# Altium PCB PCP-Support-STM32F407.PcbDoc (part 1 of 3)
Units mm, origin at the board's own origin, x right, y up, seen from the top; angles counter-clockwise.
Board outline 200 x 110 mm, 4 copper layers (Top Layer, Int1 (GND), Int2 (PWR), Bottom Layer), stack 1.369 mm thick; 103 components, 128 nets, 450 pads, 626 vias.
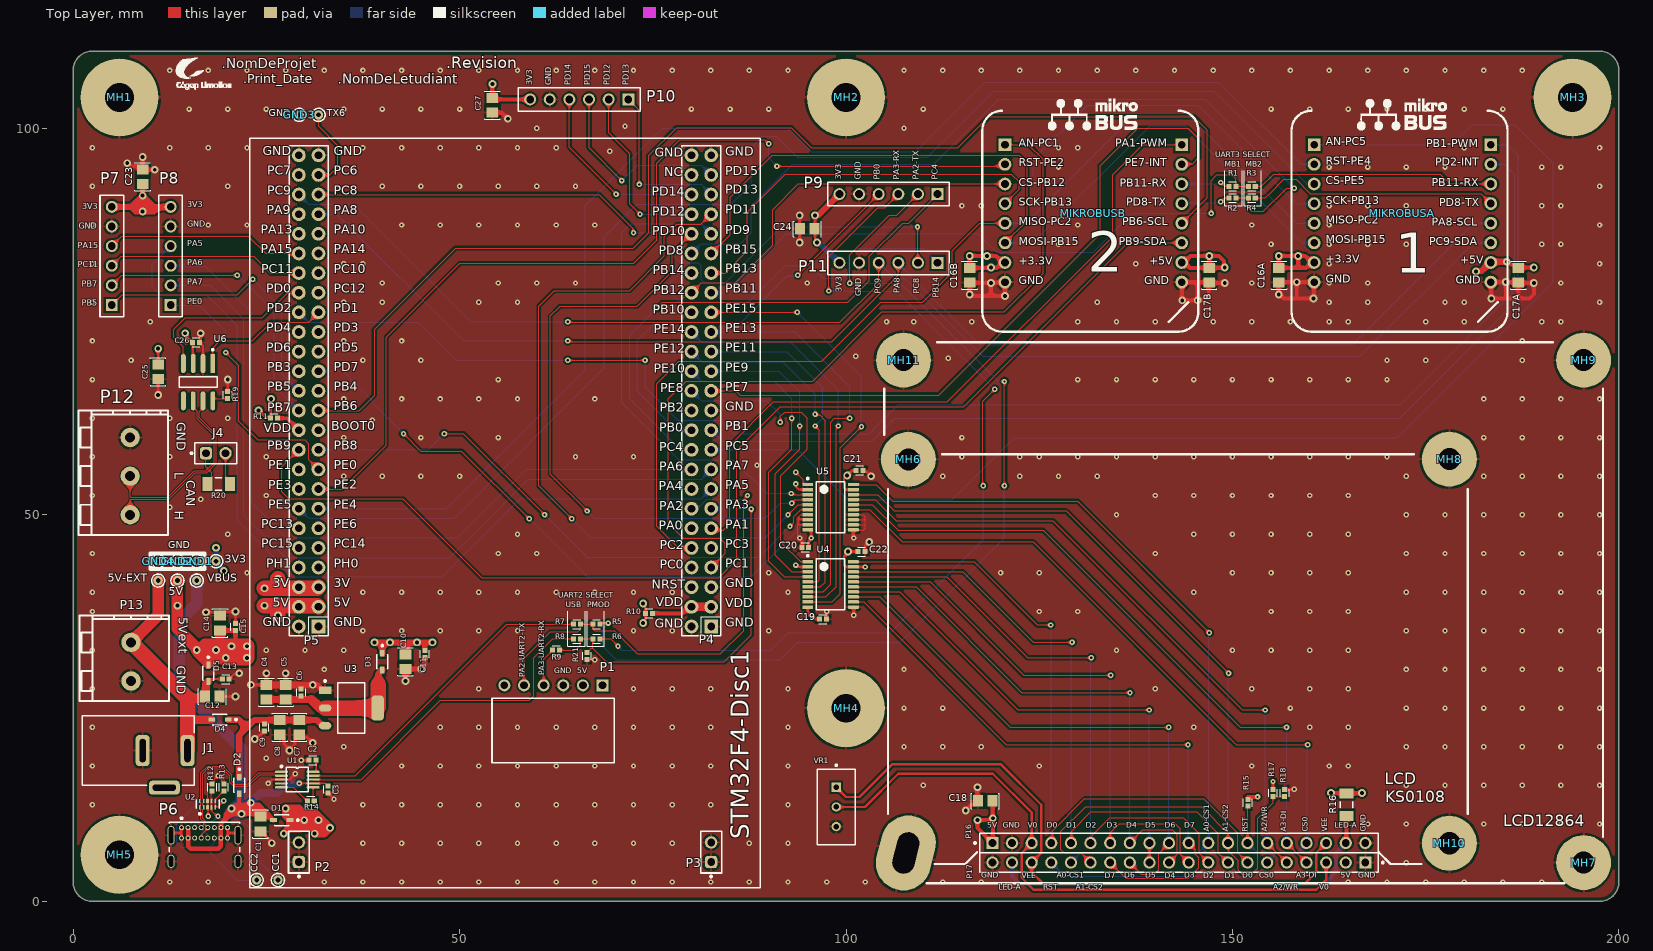
[diagram p0: Top Layer view]
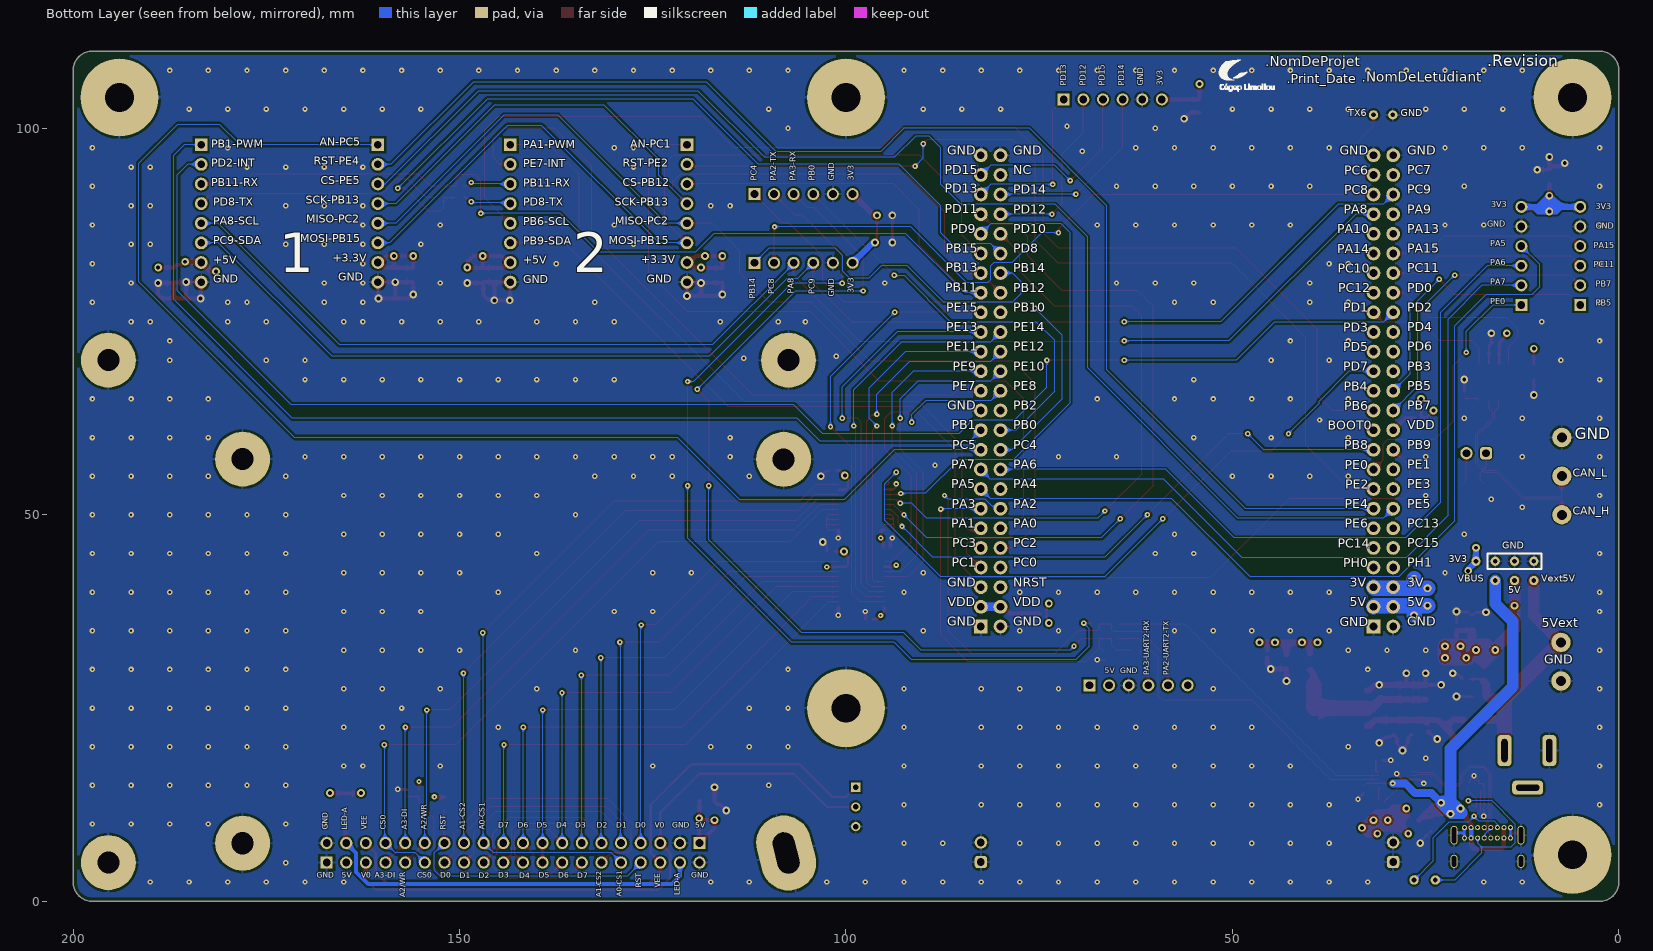
[diagram p1: Bottom Layer view, seen from below]
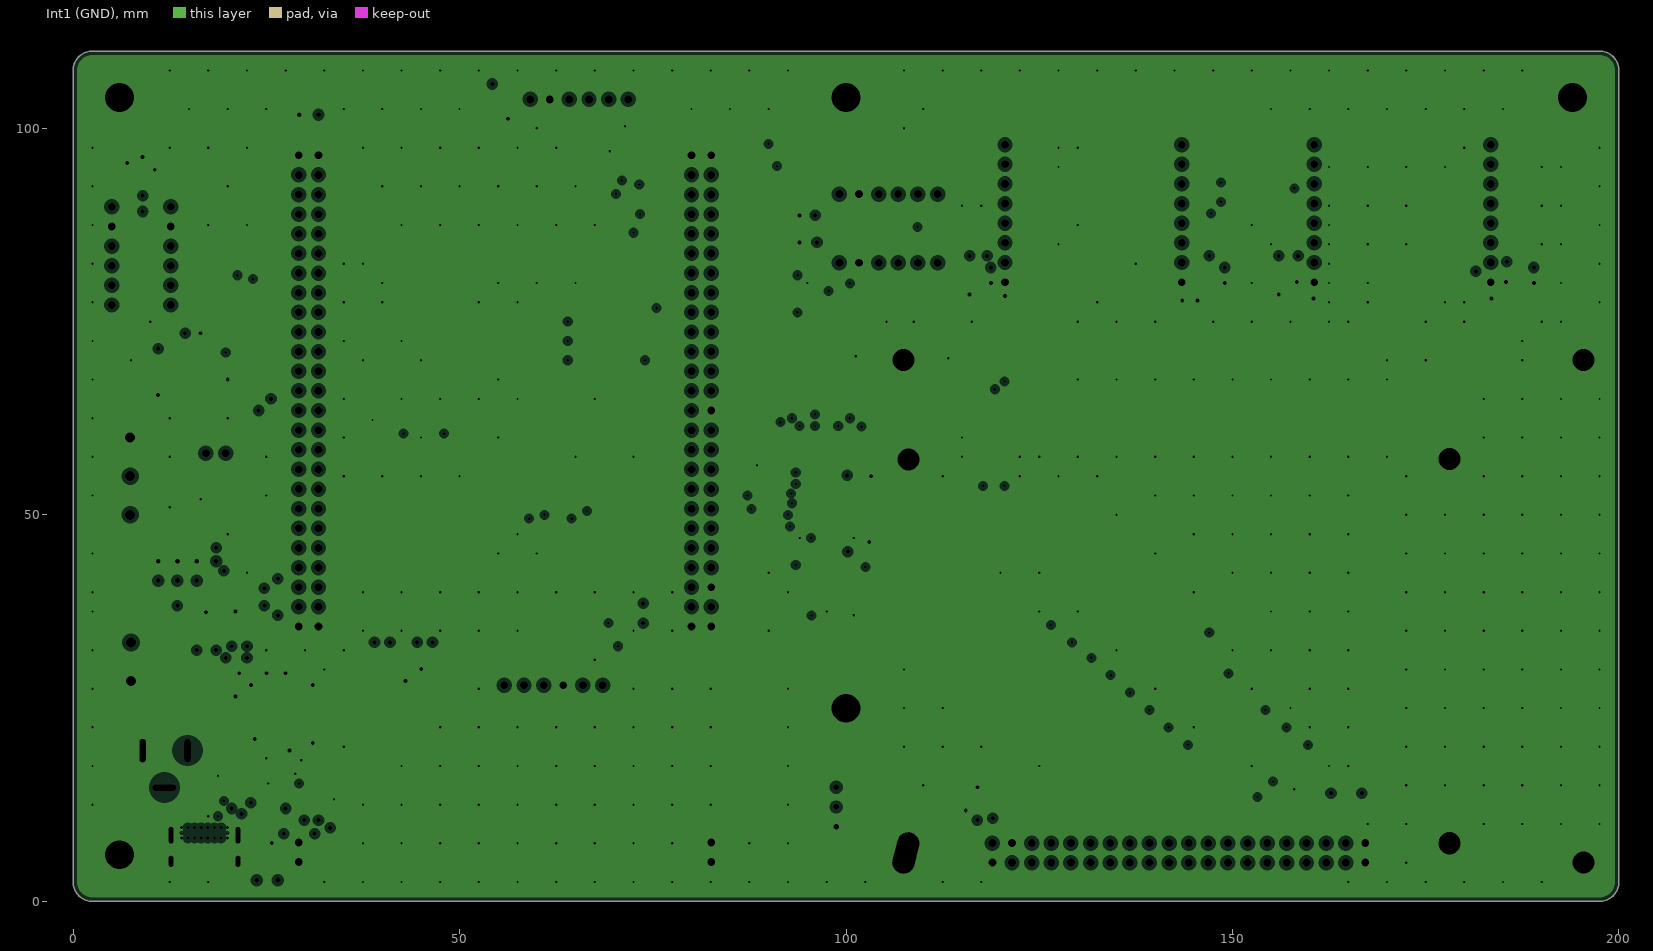
[diagram p2: Int1 (GND), clearances drawn from the general rule]
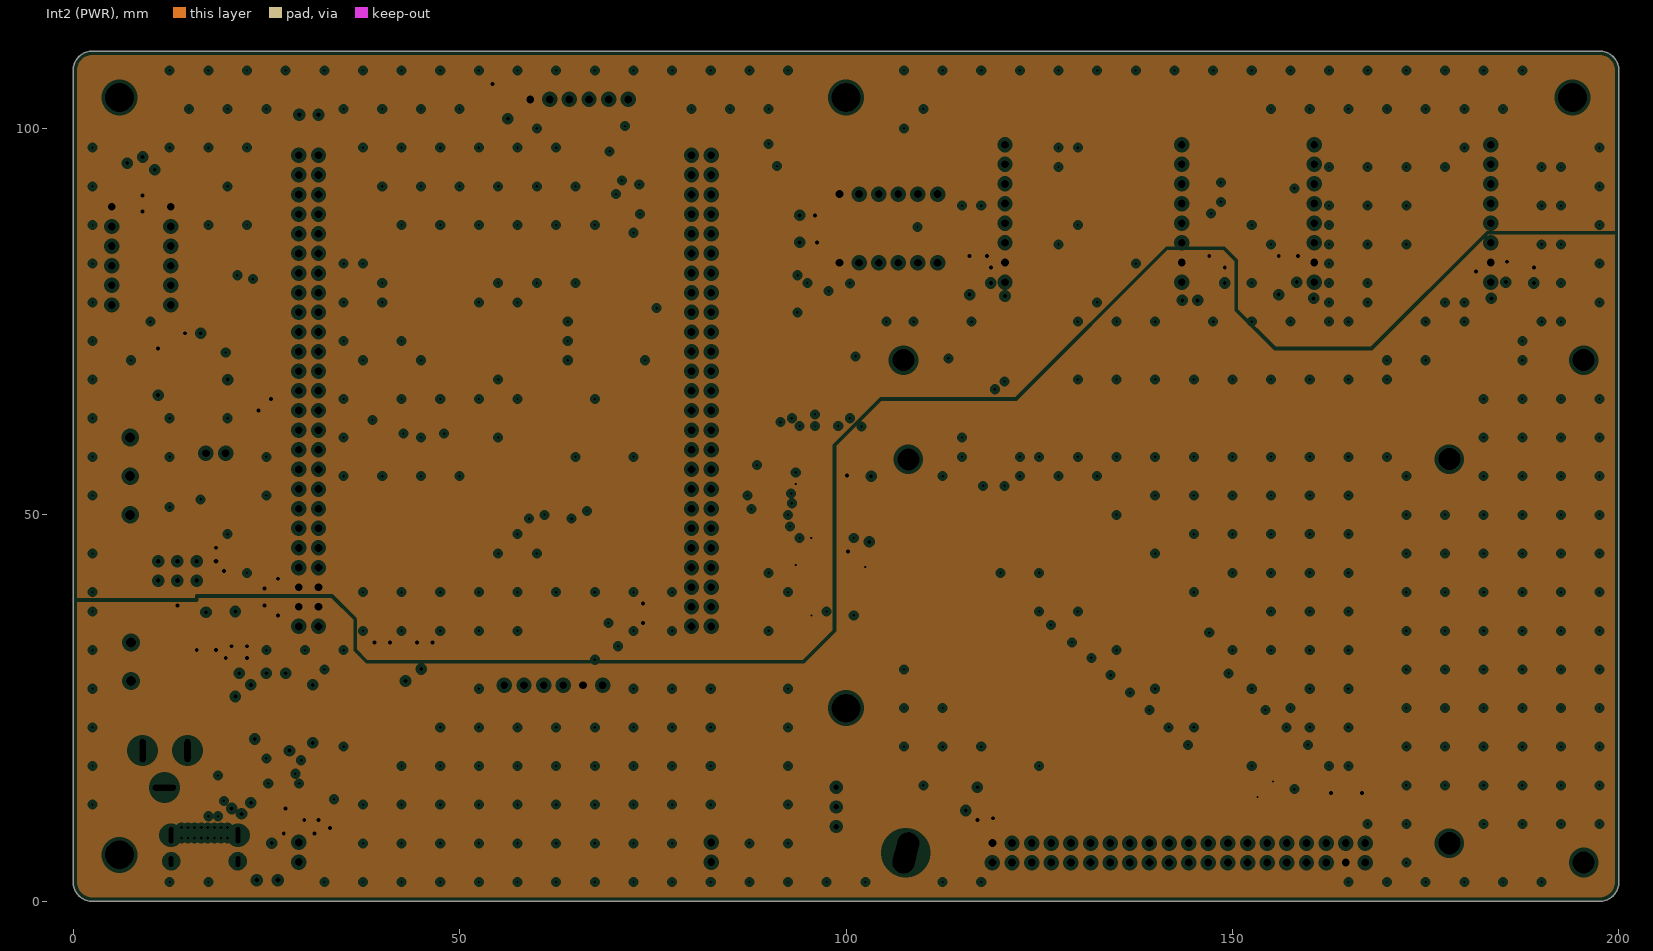
[diagram p3: Int2 (PWR), clearances drawn from the general rule]
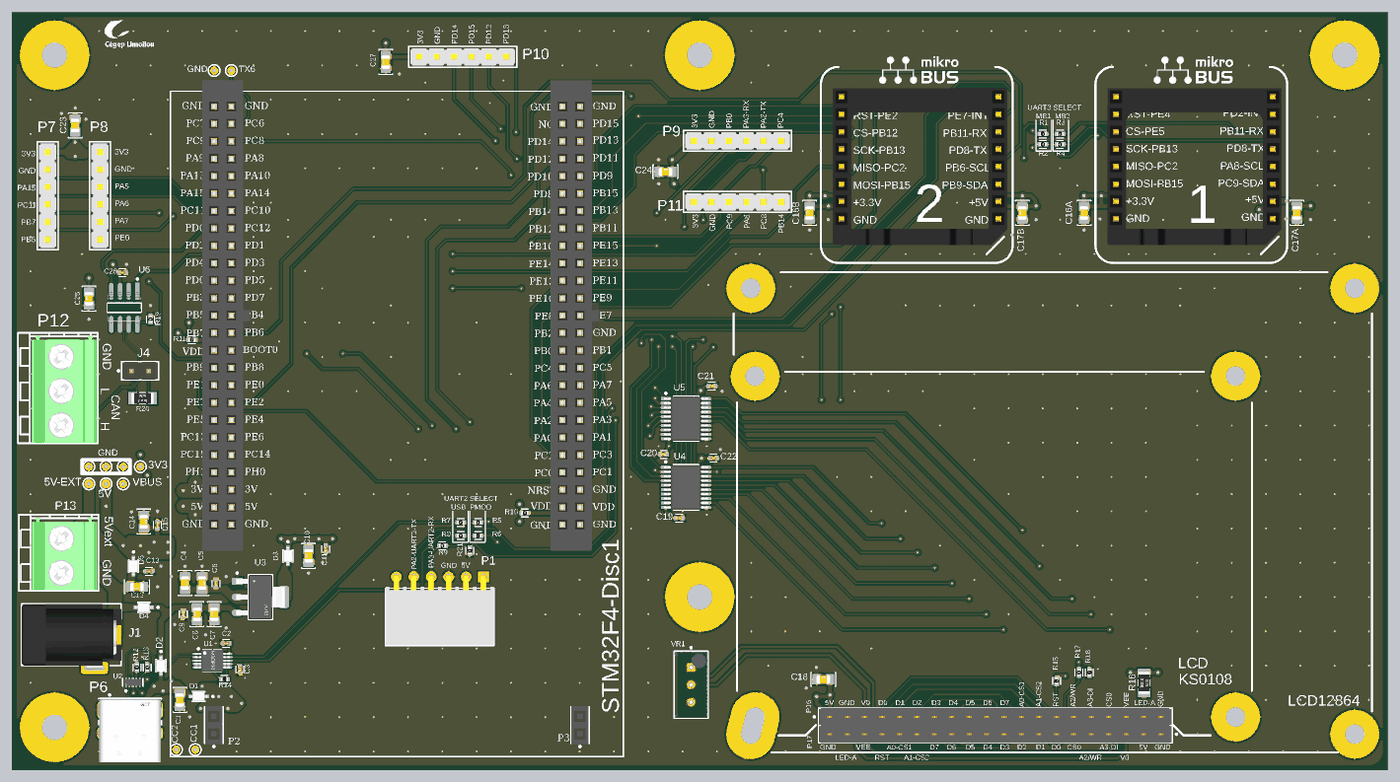
[diagram p5: 3D render of the assembled board from above, using the file's embedded part models]

## Layer stack, top to bottom
Top Solder: solder mask 0.0254, SM-001, Dk 4
Top Layer: signal copper 0.035
Dielectric 1: prepreg 0.1295, PP-017, Dk 4.3
Dielectric 2: prepreg 0.1295, PP-017, Dk 4.3
Int1 (GND): plane copper 0.035, net GND
Dielectric 3: core 0.7112, Core-039, Dk 4.8
Int2 (PWR): plane copper 0.035, net (Multiple Nets)
Dielectric 4: prepreg 0.1295, PP-017, Dk 4.3
Dielectric 5: prepreg 0.1295, PP-017, Dk 4.3
Bottom Layer: signal copper 0.035
Bottom Solder: solder mask 0.0254, SM-001, Dk 4

## Board outline
2.5,0 cw(c2.5,2.5) 0,2.5 0,107.5 cw(c2.5,107.5) 2.5,110 197.5,110 cw(c197.5,107.5) 200,107.5 200,2.5 cw(c197.5,2.5) 197.5,0

## Design rules (kind name [scope] priority, off if disabled: settings)
BoardOutlineClearance [All] p1: gap=0.5 ignorepadtopadclearanceinfootprint=FALSE
Clearance Clearance_diifPair [InDifferentialPair('CAN') or InDifferentialPair('USB_D')] p1: gap=0.125 ignorepadtopadclearanceinfootprint=FALSE
Clearance Clearance_poly [inpoly] p2: gap=0.25 ignorepadtopadclearanceinfootprint=FALSE
Clearance [All] p3: gap=0.15 ignorepadtopadclearanceinfootprint=FALSE
DiffPairsRouting [All] p1: maxlimit=0.125 minlimit=0.125 mostfreqgap=0.125 toplayer_minwidth=0.125 toplayer_maxwidth=0.125 toplayer_prefwidth=0.125 bottomlayer_minwidth=0.125 bottomlayer_maxwidth=0.125 bottomlayer_prefwidth=0.125 maxuncoupledlength=15
HoleSize [All] p1: absolutevalues=TRUE maxlimit=5.5 minlimit=0.2 maxpercent=80.000 minpercent=20.000
HoleToHoleClearance [All] p1: gap=0.3 allowstackedmicrovias=TRUE
MinimumSolderMaskSliver [All] p1: minsoldermaskwidth=0.099
PlaneClearance [All] p1: clearance=0.5
PlaneConnect [All] p1: pad.planeconnectstyle=Relief pad.reliefexpansion=0.25 pad.reliefentries=4 pad.reliefconductorwidth=0.5 pad.reliefairgap=0.25 via.planeconnectstyle=Direct via.reliefexpansion=0.508 via.reliefentries=4 via.reliefconductorwidth=0.254 via.reliefairgap=0.254
PolygonConnect [All] p1: thpad.connectstyle=Relief thpad.reliefconductorwidth=0.3 thpad.reliefentries=4 thpad.polygonreliefangle="90 Angle" thpad.airgapwidth=0.3 smdpad.connectstyle=Relief smdpad.reliefconductorwidth=0.3 smdpad.reliefentries=4 smdpad.polygonreliefangle="90 Angle" smdpad.airgapwidth=0.3 via.connectstyle=Direct via.reliefconductorwidth=0.254 via.reliefentries=4 via.polygonreliefangle="90 Angle" via.airgapwidth=0.254
RoutingVias [All] p1: holewidth=0.5 width=1 viastyle="Through Hole" minholewidth=0.3 minwidth=0.6 maxholewidth=0.7 maxwidth=1.2
SilkToSilkClearance [All] p1: silktosilkclearance=0
SilkToSolderMaskClearance [IsPad] p1: minsilkscreentomaskgap=0 clearancetoexposedcopper=TRUE
SolderMaskExpansion [All] p1: expansion=0.05 istentingtop=FALSE
SupplyNets "Schematic Supply Nets_7" [InNet('VDDB')] p1: voltage=0.000
SupplyNets "Schematic Supply Nets_5" [InNet('VDDA')] p2: voltage=0.000
SupplyNets "Schematic Supply Nets_4" [InNet('V5V_EXT')] p3: voltage=0.000
SupplyNets "Schematic Supply Nets_3" [InNet('VBUS')] p4: voltage=0.000
SupplyNets "Schematic Supply Nets_2" [InNet('VCC_3V3')] p5: voltage=0.000
SupplyNets "Schematic Supply Nets_1" [InNet('VCC_5V')] p6: voltage=0.000
SupplyNets "Schematic Supply Nets" [InNet('GND')] p7: voltage=0.000
Width [All] p1: maxlimit=5 minlimit=0.125 preferedwidth=0.15
22 further rules are at their usual default settings.

## Classes and differential pairs
component class CAN-Driver: C25 C26 J4 P12 R19 R20 U6
net class PMOD: PA5/SPI1-CLK PA6/SPI1-MISO PA7/SPI1-MOSI PA8/I2C3-SCL PA15/D3 PB0/D1 PB5/D0 PB7/D1 PB14/D2 PC4/D0 PC8/D3 PC9/I2C3-SDA PC11/D2 PD12 PD13 PD14 PD15 PE0/CS_B PMOD-RX PMOD-TX
net class MB2: MB1-RX MB1-TX PA8/I2C3-SCL PB1/TIM-3/8 PB13/SPI2-SCK PB15/SPI2-MOSI PC2/SPI2-MISO PC5/ADC12-IN15 PC9/I2C3-SDA PD2/INT PE4/RST PE5/CS
net class MB1: MB2-RX MB2-TX PA1/TIM-2/5 PB6/I2C1-SCL PB9/I2C1-SDA PB12/CS PB13/SPI2-SCK PB15/SPI2-MOSI PC1/ADC123-IN11 PC2/SPI2-MISO PE2/RST PE7/INT
net class LCD: PB8/CS0 PD7/A0 PD9/A1 PD10/A2 PD11/A3 PE8/D0 PE9/D1 PE10/D2 PE11/D3 PE12/D4 PE13/D5 PE14/D6 PE15/D7
net class USB-CAN: PD0/CAN-RX PD1/CAN-TX USB-UART-RX USB-UART-TX
component class USB-Power: 3V3 5V 5V-EXT C1 C2 C3 C4 C5 C6 C7 C8 C9 C10 C11 C12 C13 C14 C15 CC1 CC2 D1 D2 D3 D4 D5 GND1 GND2 GND4 J1 P6 P13 R12 R13 R14 U1 U2 U3 VBUS
component class PMOD-Connecteur: C23 C24 C27 P7 P8 P9 P10 P11 PMOD_1 PMOD_2
channel class MikroBus-Connecteur: "MikroBus-Connecteur 1" "MikroBus-Connecteur 2"
component class "MikroBus-Connecteur 2": C16B C17B MIKROBUS1 MIKROBUSB
component class "MikroBus-Connecteur 1": C16A C17A MIKROBUS2 MIKROBUSA
component class LCD-Connecteurs: C18 C19 C20 C21 C22 MH6 MH7 MH8 MH9 MH10 MH11 P16 P17 R15 R16 R17 R18 U4 U5 VR1
component class STM32Disc1-Interface: P2 P3 P4 P5 R10 R11
component class PCB-Support-STM32F407: GND3 m MH1 MH2 MH3 MH4 MH5 P1 R1 R2 R3 R4 R5 R6 R7 R8 R9 R21 TX6
differential pair USB_D: +USB_D_P -USB_D_N
differential pair CAN: +CAN_P -CAN_N

## Components (designator, comment, footprint, x,y, rotation, side; value= is the part's Value field where it differs from the comment)
3V3 "DNP" TP_TH061 18.5,44 r90 top locked
5V "DNP" TP_TH061 13.5,41.5 r90 top locked
5V-EXT "DNP" TP_TH061 11,41.5 r90 top locked
C1 "Cap 4.7uF 0805" C_2012[0805] 24.25,10 r90 top value=4.7uF
C2 "Cap 100nF 0402" C_1005[0402] 31,18.25 r0 top value=100nF
C3 "Cap 100nF 0402" C_1005[0402] 33,14.45 r90 top value=100nF
C4 "Cap 10uF 0805" C_2012[0805] 25,27.05 r270 top value=10uF
C5 "Cap 4.7uF 0805" C_2012[0805] 27.5,27.05 r270 top value=4.7uF
C6 "Cap 100nF 0402" C_1005[0402] 29.5,27 r270 top value=100nF
C7 "Cap 10uF 0805" C_2012[0805] 29.25,22.5 r90 top value=10uF
C8 "Cap 4.7uF 0805" C_2012[0805] 26.75,22.5 r90 top value=4.7uF
C9 "Cap 100nF 0402" C_1005[0402] 24.75,22.5 r90 top value=100nF
C10 "Cap 4.7uF 0805" C_2012[0805] 43,31 r90 top value=4.7uF
C11 "Cap 100nF 0402" C_1005[0402] 45.5,32 r90 top value=100nF
C12 "Cap 4.7uF 0805" C_2012[0805] 18,26.5 r180 top value=4.7uF
C13 "Cap 100nF 0402" C_1005[0402] 19.75,28.75 r180 top value=100nF
C14 "Cap 4.7uF 0805" C_2012[0805] 19,36 r270 top value=4.7uF
C15 "Cap 100nF 0402" C_1005[0402] 21,35.5 r270 top value=100nF
C16A "Cap 4.7uF 0805" C_2012[0805] 156,81 r90 top value=4.7uF (schematic designator C16)
C16B "Cap 4.7uF 0805" C_2012[0805] 116,81 r90 top value=4.7uF (schematic designator C16)
C17A "Cap 4.7uF 0805" C_2012[0805] 187,81 r90 top value=4.7uF (schematic designator C17)
C17B "Cap 4.7uF 0805" C_2012[0805] 147,81 r90 top value=4.7uF (schematic designator C17)
C18 "Cap 4.7uF 0805" C_2012[0805] 118,13 r0 top value=4.7uF
C19 "Cap 100nF 0402" C_1005[0402] 97,36.5 r180 top value=100nF
C20 "Cap 100nF 0402" C_1005[0402] 94.727,45.79 r0 top value=100nF
C21 "Cap 100nF 0402" C_1005[0402] 101.75,55.75 r180 top value=100nF
C22 "Cap 100nF 0402" C_1005[0402] 102,45.25 r180 top value=100nF
C23 "Cap 4.7uF 0805" C_2012[0805] 9,93.75 r270 top value=4.7uF
C24 "Cap 4.7uF 0805" C_2012[0805] 95,87 r0 top value=4.7uF
C25 "Cap 4.7uF 0805" C_2012[0805] 11,68.5 r90 top value=4.7uF
C26 "Cap 100nF 0402" C_1005[0402] 15.89,72.31 r180 top value=100nF
C27 "Cap 4.7uF 0805" C_2012[0805] 54.25,103 r90 top value=4.7uF
CC1 "DNP" TP_TH061 26.5,2.75 r0 top
CC2 "DNP" TP_TH061 23.75,2.75 r90 top
D1 "BAT60JFILM" SOD323 27,10.5 r180 top
D2 "BAT60JFILM" SOD323 21.5,15 r270 top
D3 "BAT60JFILM" SOD323 40,31 r270 top
D4 "BAT60JFILM" SOD323 19,23.5 r180 top
D5 "BAT60JFILM" SOD323 17.5,29.5 r270 top
GND1 "GND" TP_TH061 16,44 r0 top locked value=DNP
GND2 "GND" TP_TH061 13.5,44 r90 top locked value=DNP
GND3 "GND" TP_TH061 29.25,101.75 r0 top value=DNP
GND4 "GND" TP_TH061 11,44 r0 top locked value=DNP
J1 "694106301002" CONN_DC-JACK_RA 8.45,19.5 r270 top
J4 "61300211121" CONN_HDR_2POS_100MILS_TH 18.455,57.975 r0 top value=R120
MH1 "DNP" MP_M-Hole_#4-40_LOOSE-FIT 6,104 r0 top locked
MH2 "DNP" MP_M-Hole_#4-40_LOOSE-FIT 100,104 r90 top locked
MH3 "DNP" MP_M-Hole_#4-40_LOOSE-FIT 194,104 r90 top locked
MH4 "DNP" MP_M-Hole_#4-40_LOOSE-FIT 100,25 r0 top locked
MH5 "DNP" MP_M-Hole_#4-40_LOOSE-FIT 6,6 r0 top locked
MH6 "DNP" MP_M-Hole_M2.5x0.45mm_LOOSE-FIT 108.066,57.184 r90 top
MH7 "DNP" MP_M-Hole_M2.5x0.45mm_LOOSE-FIT 195.441,5.009 r90 top locked
MH8 "DNP" MP_M-Hole_M2.5x0.45mm_LOOSE-FIT 178.066,57.209 r90 top locked
MH9 "DNP" MP_M-Hole_M2.5x0.45mm_LOOSE-FIT 195.441,70.009 r90 top locked
MH10 "DNP" MP_M-Hole_M2.5x0.45mm_LOOSE-FIT 178.066,7.509 r90 top locked
MH11 "DNP" MP_M-Hole_M2.5x0.45mm_LOOSE-FIT 107.441,70.009 r90 top locked
MIKROBUSA "MIKROBUS HOST CONN." "MIKROBUS HOST CONN. TH" 172,89 r0 top locked (schematic designator MIKROBUS)
MIKROBUSB "MIKROBUS HOST CONN." "MIKROBUS HOST CONN. TH" 132,89 r0 top locked (schematic designator MIKROBUS)
P1 "PPTC061LGBN-RC" P_CONN_HDR_1ROW_6POS_RA_100MIL 62.15,27.94 r180 top
P2 "ZX-PM2.54-1-2PY" CONN_SKT_2POS_100MILS_TH 29.21,6.35 r90 top
P3 "ZX-PM2.54-1-2PY" CONN_SKT_2POS_100MILS_TH 82.55,6.35 r90 top
P4 "ZX-PM2.54-2-25PY" CONN-HEAD02X25-100MIL 81.28,66.04 r90 top
P5 "ZX-PM2.54-2-25PY" CONN-HEAD02X25-100MIL 30.48,66.04 r90 top
P6 "USB4085-GF-A" FP-USB4085-GF-A-MFG 17,5.5 r0 top
P7 "ZX-PM2.54-1-6PY" CONN_SKT_01X06_100MIL 5,83.5 r90 top locked
P8 "ZX-PM2.54-1-6PY" CONN_SKT_01X06_100MIL 12.62,83.5 r90 top locked
P9 "ZX-PM2.54-1-6PY" CONN_SKT_01X06_100MIL 105.5,91.5 r180 top
P10 "ZX-PM2.54-1-6PY" CONN_SKT_01X06_100MIL 65.48,103.75 r180 top
P11 "ZX-PM2.54-1-6PY" CONN_SKT_01X06_100MIL 105.5,82.61 r180 top
P12 "ZX-DG28V-5.0-3P" CONN_TERM_BLOCK_3POS_5mm_Model1 7.381,55.006 r90 top value=CAN
P13 "ZX-DG28V-5.0-2P" CONN_TERM_BLOCK_2POS_5mm_Model1 7.5,31 r90 top
P16 "ESQ-120-14-G-S" CONN-SKT-20POS-100MIL 143.071,7.539 r0 top locked
P17 "ESQ-120-14-G-S" CONN-SKT-20POS-100MIL 143.071,5.009 r180 top locked
R1 "Res 0R 0402" R_1005[0402] 150,92.5 r0 top value=DNP
R2 "Res 0R 0402" R_1005[0402] 150,91 r0 top value=DNP
R3 "Res 0R 0402" R_1005[0402] 152.5,92.5 r180 top value=0R
R4 "Res 0R 0402" R_1005[0402] 152.5,91 r180 top value=0R
R5 "Res 0R 0402" R_1005[0402] 67.71,35.865 r180 top value=DNP
R6 "Res 0R 0402" R_1005[0402] 67.71,33.96 r180 top value=DNP
R7 "Res 0R 0402" R_1005[0402] 65.17,35.865 r0 top value=0R
R8 "Res 0R 0402" R_1005[0402] 65.17,33.96 r0 top value=0R
R9 "Res 5k1 1% 0402" R_1005[0402] 62.5,32.5 r180 top value=5k1
R10 "Res 0R 0402" R_1005[0402] 74.5,37.25 r0 top value=0R
R11 "Res 0R 0402" R_1005[0402] 26,62.5 r0 top value=0R
R12 "Res 5k1 1% 0402" R_1005[0402] 18,14.75 r270 top value=5k1
R13 "Res 5k1 1% 0402" R_1005[0402] 19.5,14.75 r270 top value=5k1
R14 "Res 4k7 1% 0402" R_1005[0402] 30.75,13 r0 top value=DNP
R15 "Res 10k 1% 0402" R_1005[0402] 152,12.75 r90 top value=10k
R16 "Res 20R 1206" R_3216[1206] 164.75,12.5 r270 top value=20R
R17 "Res 49k9 1% 0402" R_1005[0402] 155.25,14 r90 top value=49k9
R18 "Res 49k9 1% 0402" R_1005[0402] 156.75,14 r270 top value=DNP
R19 "Res 10k 1% 0402" R_1005[0402] 20,65.5 r270 top value=10k
R20 "Res 120R 1206" R_3216[1206] 18.825,53.975 r0 top value=120R
R21 "Res 10k 1% 0402" R_1005[0402] 66.49,31.74 r90 top value=10k
TX6 "DNP" TP_TH061 31.75,101.75 r0 top
U1 "CH340X" U_MSOP50P300X500-10(RM-10)_WO-TP 29,15.75 r270 top
U2 "TPD4E05U06QDQARQ1" U_USON50P250X100-10 17.405,12.565 r180 top
U3 "AMS1117-3.3" SOT-223 36,25 r0 top
U4 "TXB0108PWR" U_TSSOP65P660X450-20 98,41 r0 top
U5 "TXB0108PWR" U_TSSOP65P660X450-20 98,51 r0 top
U6 "SN65HVD230DR" SOIC-8 16.17,67.166 r270 top
VBUS "DNP" TP_TH061 16,41.5 r90 top
VR1 "3296W-1-103LF" R-POT-TH-TOP 98.745,12.21 r180 top

## Footprints (in the part's own frame and the unit in brackets; to place one, negate y for a bottom-side part, rotate by r counter-clockwise, add the part's x,y. Pads: shape width x height; smd on the part's side, far side on the other; paste and mask are expansions set on the pad)
C_1005[0402] [mm] "Capacitor MLCC; Body 1.1 x 0.5 mm (LxW typ)"
  rect 0.65x0.65 smd mask+0.075: 1(-0.45,0) 2(0.45,0)
  silkscreen extent -0.5,-0.57 0.5,0.58, body extent -0.51,-0.25 0.51,0.25, height 0.51
C_2012[0805] [mm] "Capacitor MLCC; Body 2.0 x 1.3 mm (LxW typ)"
  rect 1.3x1.5 smd: 1(-0.95,0) 2(0.95,0)
  silkscreen extent -1.83,-1 1.83,1, body extent -1,-0.62 1,0.63, height 0.78
CONN-HEAD02X25-100MIL [mil]
  rect 70x70 hole 39.37: 1(-1200,-50)
  round 70 hole 39.37: 2(-1200,50) 3(-1100,-50) 4(-1100,50) 5(-1000,-50) 6(-1000,50) 7(-900,-50) 8(-900,50) 9(-800,-50) 10(-800,50) 11(-700,-50) 12(-700,50) 13(-600,-50) 14(-600,50) 15(-500,-50) 16(-500,50) 17(-400,-50) 18(-400,50) 19(-300,-50) 20(-300,50) 21(-200,-50) 22(-200,50) 23(-100,-50) 24(-100,50) 25(0,-50) 26(0,50) 27(100,-50) 28(100,50) 29(200,-50) 30(200,50) 31(300,-50) 32(300,50) 33(400,-50) 34(400,50) 35(500,-50) 36(500,50) 37(600,-50) 38(600,50) 39(700,-50) 40(700,50) 41(800,-50) 42(800,50) 43(900,-50) 44(900,50) 45(1000,-50) 46(1000,50) 47(1100,-50) 48(1100,50) 49(1200,-50) 50(1200,50)
  silkscreen extent -1248,-101 1248,100, body extent -1350,-158 1350,118, height 335
CONN-SKT-20POS-100MIL [mm]
  rect 1.57x1.57 hole 1 paste-2539.97 mask+0: 1(-24.13,0)
  round 1.57 hole 1 paste-2539.97 mask+0: 2(-21.59,0) 3(-19.05,0) 4(-16.51,0) 5(-13.97,0) 6(-11.43,0) 7(-8.89,0) 8(-6.35,0) 9(-3.81,0) 10(-1.27,0) 11(1.27,0) 12(3.81,0) 13(6.35,0) 14(8.89,0) 15(11.43,0) 16(13.97,0) 17(16.51,0) 18(19.05,0) 19(21.59,0) 20(24.13,0)
  silkscreen extent -26.51,-1.27 25.78,1.27, body extent -25.88,-1.37 25.88,1.37, height 0.25
CONN_DC-JACK_RA [mm] "DC Power Jack Right Angle"
  rrect50% 4x1.8 hole 0.8 slot 3 at 0 deg: 1(0,6.35) 2(0,0.55)
  rrect50% 1.8x4 hole 0.8 slot 3 at 90 deg: 3(4.8,3.35)
  silkscreen extent -4.5,-7.25 4.5,7.25, body extent -4.5,-7.25 5,7.25, height 10.75
CONN_HDR_2POS_100MILS_TH [mm] "Pin Header, pitch 2.54 mm, THT, Vertical, single row, 2p"
  rrect50% 1.6x1.6 hole 1: 1(-1.27,0)
  round 1.6 hole 1: 2(1.27,0)
  silkscreen extent -3.26,-1.35 2.69,1.35, body extent -2.54,-1.27 2.54,1.27, height 8.57
CONN_SKT_01X06_100MIL [mm] "SQ Post Socket, 1x6 Pins, Vertical, 2.54mm Pitch, Female"
  rect 1.55x1.55 hole 1: 1(-6.35,0)
  round 1.55 hole 1: 2(-3.81,0) 3(-1.27,0) 4(1.27,0) 5(3.81,0) 6(6.35,0)
  silkscreen extent -7.87,-1.52 7.88,1.52, body extent -7.62,-1.27 7.62,1.27, height 4.57
CONN_SKT_2POS_100MILS_TH [mm] "Receptacle, pitch 2.54 mm, THT, Vertical, single row, 2p"
  rrect50% 1.6x1.6 hole 1: 1(-1.27,0)
  round 1.6 hole 1: 2(1.27,0)
  silkscreen extent -3.26,-1.35 2.69,1.35, body extent -2.79,-1.27 2.79,1.27, height 8.51
CONN_TERM_BLOCK_2POS_5mm_Model1 [mm] "Terminal Block 2 positions Throught hole"
  round 2.5 hole 1.3: 1(-2.5,0) 2(2.5,0)
  silkscreen extent -5.1,-4.9 6,6.7, body extent -4.98,-4.7 5.59,4.8, height 15.1
CONN_TERM_BLOCK_3POS_5mm_Model1 [mm] "Terminal Block 3 positions Throught hole"
  round 2.5 hole 1.3: 1(-5,0) 2(0,0) 3(5,0)
  silkscreen extent -7.6,-4.9 8.5,6.7, body extent -7.49,-4.8 8.08,4.7, height 15.1
FP-USB4085-GF-A-MFG [mm]
  rrect100% 0.9x2.4 hole 2.1 slot 0.6 at 0 deg paste-2539.97 mask+0: 1(-4.325,3.045) 2(4.325,3.045)
  rrect100% 0.9x1.7 hole 1.4 slot 0.6 at 0 deg paste-2539.97 mask+0: 3(-4.325,-0.335) 4(4.325,-0.335)
  round 0.65 hole 0.4 paste-2539.97 mask+0: A1(-2.975,4.025) A4(-2.125,4.025) A5(-1.275,4.025) A6(-0.425,4.025) A7(0.425,4.025) A8(1.275,4.025) A9(2.125,4.025) A12(2.975,4.025) B1(2.975,2.675) B4(2.125,2.675) B5(1.275,2.675) B6(0.425,2.675) B7(-0.425,2.675) B8(-1.275,2.675) B9(-2.125,2.675) B12(-2.975,2.675)
  silkscreen extent -4.57,0.89 4.57,5.37, body extent -4.87,-4.83 4.87,4.83, height 0.25
"MIKROBUS HOST CONN. TH" [mil]
  rect 65x65 hole 39.37: 1(-450,350) 16(450,350)
  round 65 hole 39.37: 2(-450,250) 3(-450,150) 4(-450,50) 5(-450,-50) 6(-450,-150) 7(-450,-250) 8(-450,-350) 9(450,-350) 10(450,-250) 11(450,-150) 12(450,-50) 13(450,50) 14(450,150) 15(450,250)
  silkscreen extent -565,-602 535,584, body extent -497,-501 504,401, height 434
MP_M-Hole_#4-40_LOOSE-FIT [mm] "Monting Hole #4-40 Loose Fit"
  round 10.1 hole 3.7 paste-2539.97: 1(0,0)
MP_M-Hole_M2.5x0.45mm_LOOSE-FIT [mm] "Monting Hole M2.5x0.45mm LOOSE Fit"
  round 7.1 hole 2.85 paste-2539.97: 1(0,0)
P_CONN_HDR_1ROW_6POS_RA_100MIL [mm] "Header, 1x6 Pins, Right Angle, 2.54mm Pitch, Female"
  rect 1.55x1.55 hole 1: 1(-6.35,0)
  round 1.55 hole 1: 2(-3.81,0) 3(-1.27,0) 4(1.27,0) 5(3.81,0) 6(6.35,0)
  silkscreen extent -7.87,1.65 7.95,10.03, body extent -7.85,-0.3 7.9,9.94, height 2.46
R-POT-TH-TOP [mm]
  rect 1.2x1.2 hole 0.7 paste-2539.97 mask+0: 1(0.005,-2.54)
  round 1.2 hole 0.7 paste-2539.97 mask+0: 2(0.005,0) 3(0.005,2.54)
  silkscreen extent -2.48,-5.52 2.48,4.89, body extent -2.58,-4.99 2.58,4.99, height 0.25
R_1005[0402] [mm] "Chip Resistor; Body 1.1 x 0.5 mm (LxW typ)"
  rect 0.65x0.65 smd mask+0.075: 1(-0.45,0) 2(0.45,0)
  silkscreen extent -0.5,-0.57 0.5,0.58, body extent -0.5,-0.25 0.5,0.26, height 0.36
R_3216[1206] [mm] "Chip Resistor, Body 3.2x1.6mm, IPC Medium Density"
  rect 1.3x1.8 smd: 1(-1.45,0) 2(1.45,0)
  silkscreen extent -0.4,-0.8 0.4,0.8, body extent -1.6,-0.8 1.6,0.8, height 0.55
SOD323 [mm]
  rect 0.86x0.54 smd paste+0 mask+0: 1(-1.07,0) 2(1.07,0)
  silkscreen extent -2.2,-0.72 0.9,0.72, body extent -1.6,-0.82 1.6,0.82, height 0.25
SOIC-8 [mm]
  rect 2.469x0.622 smd paste+0 mask+0: 1(-2.414,1.905)
  rrect100% 2.469x0.622 smd paste+0 mask+0: 2(-2.414,0.635) 3(-2.414,-0.635) 4(-2.414,-1.905) 5(2.414,-1.905) 6(2.414,-0.635) 7(2.414,0.635) 8(2.414,1.905)
  silkscreen extent -4.32,-2.45 0.68,2.45, body extent -4.15,-2.95 4.15,2.95, height 0.25
SOT-223 [mm]
  rect 1.604x0.952 smd paste+0 mask+0: 1(-3.395,2.29)
  rrect100% 1.604x0.952 smd paste+0 mask+0: 2(-3.395,0) 3(-3.395,-2.29)
  rrect59% 1.604x3.262 smd paste+0 mask+0: 4(3.395,0)
  silkscreen extent -3.52,-3.25 1.75,3.62, body extent -4.7,-3.75 4.7,3.75, height 0.25
TP_TH061 [mm] "Test point hole 0.61mm diameter (AWG28)"
  round 1.2 hole 0.61: 1(0,0)
  silkscreen extent -0.85,-0.85 0.85,0.85
U_MSOP50P300X500-10(RM-10)_WO-TP [mm] "Shrink Small Outline; 10 Leads; Body Width 3 mm; Pitch 0.5 mm"
  oval 0.3x1.7 smd mask+0.05: 1(-1,-2.05) 2(-0.5,-2.05) 3(0,-2.05) 4(0.5,-2.05) 5(1,-2.05) 6(1,2.05) 7(0.5,2.05) 8(0,2.05) 9(-0.5,2.05) 10(-1,2.05)
  silkscreen extent -1.82,-2.17 1.58,1.43, body extent -1.6,-2.58 1.6,2.57, height 1.09
U_TSSOP65P660X450-20 [mm] "SOP, 20-Leads, Body 6.6x4.5mm, Pitch 0.65mm, IPC Medium Density"
  rrect22% 1.4x0.45 smd: 1(-2.95,2.925) 2(-2.95,2.275) 3(-2.95,1.625) 4(-2.95,0.975) 5(-2.95,0.325) 6(-2.95,-0.325) 7(-2.95,-0.975) 8(-2.95,-1.625) 9(-2.95,-2.275) 10(-2.95,-2.925) 11(2.95,-2.925) 12(2.95,-2.275) 13(2.95,-1.625) 14(2.95,-0.975) 15(2.95,-0.325) 16(2.95,0.325) 17(2.95,0.975) 18(2.95,1.625) 19(2.95,2.275) 20(2.95,2.925)
  silkscreen extent -3.07,-3.3 1.85,3.82, body extent -3.21,-3.25 3.21,3.25, height 1
U_USON50P250X100-10 [mm]
  rrect50% 0.2x0.565 smd paste+0 mask+0: 1(1,0.417) 2(0.5,0.417) 4(-0.5,0.417) 5(-1,0.417) 6(-1,-0.417) 7(-0.5,-0.417) 9(0.5,-0.417) 10(1,-0.417)
  rrect25% 0.4x0.565 smd paste-0.025 mask+0: 3(0,0.417) 8(0,-0.417)
  silkscreen extent -1.48,-0.55 1.48,1.37, body extent -1.4,-0.8 1.4,0.8, height 0.25

## Part data
3V3 5V 5V-EXT CC1 CC2 TX6 VBUS: library part TP_TH0.61mm(AWG28), "Pad TH 0.61mm diameter (AWG28)", Supplier Part Number 1=N/A, Manufacturer Part Number 1=DNP, Supplier 1=N/A
C1 C5 C8 C10 C12 C14 C16A C16B C17A C17B C18 C23 C24 C25 C27: library part CAP003, "Capacitor type 1", Dielectric=X7R, Manufacturer 1="Taiyo Yuden", Manufacturer Part Number 1=TMK212AB7475KG-T, Rated voltage=25V, Supplier Part Number 1=C163186, Tolerance=10%, CEGEP=KCOND02SM, LibRef=CAP003, Mounting Technology=SMT, Supplier 1=LCSC
C2 C3 C6 C9 C11 C13 C15 C19 C20 C21 C22 C26: library part CAP001, "Capacitor type 1", Dielectric=X7R, Manufacturer 1="Taiyo Yuden", Manufacturer Part Number 1=UMK105B7104KV-FR, Rated voltage=50V, Supplier Part Number 1=C2167491, Tolerance=10%, CEGEP=KCOND01SM, LibRef=CAP001, Mounting Technology=SMT, Supplier 1=LCSC
C4 C7: library part CAP004, "Capacitor type 1", Dielectric=X5R, Manufacturer 1=Samsung, Manufacturer Part Number 1=CL21A106KAYNNNE, Rated voltage=25V, Supplier Part Number 1=C15850, Tolerance=10%, CEGEP=KCOND03SM, LibRef=CAP004, Mounting Technology=SMT, Supplier 1=LCSC
D1 D2 D3 D4 D5: library part D_BAT60, "DIODE SCHOTTKY 10V 3A SOD323", Manufacturer 1=ST, Supplier Part Number 1=C133103, Manufacturer Part Number 1=BAT60JFILM, Mounting Technology=SMT, Supplier 1=LCSC
GND1 GND2 GND3 GND4: library part TP_TH0.61mm(AWG28), "Pad TH 0.61mm diameter (AWG28)", Manufacturer Part Number 1=DNP, Supplier Part Number 1=N/A, Supplier 1=N/A
J1: library part CONN-DC-JACK-2MM5, "DC Barrel Connector 2.5mm", Manufacturer 1="XKB Connection", Manufacturer Part Number 1=DC-005-5A-2.5, Supplier Part Number 1=C381115, Mounting Technology=TH, Supplier 1=LCSC
J4: library part CONN-100MIL-HDR-01X02, "CONN HEADER 2POS 100MIL", Manufacturer 1=Megastar, Manufacturer 2="Würth Elektronik", Manufacturer Part Number 1=ZX-PZ2.54-1-2PZZ, Supplier Part Number 1=C7501260, Manufacturer Part Number 2=61300211121, Mounting Technology=TH, Supplier 1=LCSC
MH1 MH2 MH3 MH4 MH5: library part MH-4-40, "Mounting Hole #4-40 w/ Flat Washer", Supplier Part Number 1=N/A, Manufacturer Part Number 1=DNP
MH6 MH7 MH8 MH9 MH10 MH11: library part MH-2.5MM, "Mounting Hole 2.5mm w/ Flat Washer", Supplier Part Number 1=N/A, Manufacturer Part Number 1=DNP
MIKROBUSA MIKROBUSB: library part MIKROBUS-HOST-CONN, "mikroBUS Host Socket"
P1: library part CONN-100MIL-SKT-01X06_RA, "CONN SOCKET 6pos 100mils Right Angle", Manufacturer 1=Megastar, Manufacturer 2=Sullins, Manufacturer 3=Samtec, Manufacturer Part Number 1=ZX-PM2.54-1-6PWZ, Manufacturer Part Number 3=SSW-106-02-T-S-RA, Supplier Part Number 1=C49326178, Manufacturer Part Number 2=PPTC061LGBN-RC, Mounting Technology=TH, Supplier 1=LCSC, Supplier 2=Digikey, Supplier Part Number 2=S5442-ND
P2 P3: library part CONN-100MIL-SKT-01X02, "CONN SOCKET 2pins single row , 100mils TH", Manufacturer 1=Megastar, Manufacturer 2="Würth Elektronik", Manufacturer Part Number 2=61300211121, Supplier Part Number 1=C7499322, Manufacturer Part Number 1=ZX-PM2.54-1-2PY, Mounting Technology=TH, Supplier 1=LCSC
P4 P5: library part CONN-100MIL-SKT-02X25, "CONN SOCKET 2x25POS, Dual row 100MIL", Manufacturer 1=Megastar, Manufacturer 2=Sullins, Manufacturer Part Number 2=SFH11-PBPC-D25-ST-BK, Supplier Part Number 1=C7499355, Manufacturer Part Number 1=ZX-PM2.54-2-25PY, Mounting Technology=TH, Supplier 1=LCSC, Supplier 2=Digikey, Supplier Part Number 2=S9201-ND
P6: library part CONN-USB-C-16POS, "CONN RCPT USB2.0 TYPE C RA - TH", Manufacturer 1="Global Connector Technology", Supplier Part Number 1=C7095263, Code CEGEP="? (R13-B182)", Manufacturer Part Number 1=USB4085-GF-A, Mounting Technology=TH, Supplier 1=LCSC, Supplier 2=Digikey, Supplier Part Number 2=2073-USB4085-GF-ACT-ND
P7 P8 P9 P10 P11: library part CONN-100MIL-SKT-01X06, "CONN SOCKET 6pos 100mils", Manufacturer 1=Megastar, Supplier Part Number 1=C7499326, Manufacturer Part Number 1=ZX-PM2.54-1-6PY, Mounting Technology=TH, Supplier 1=LCSC
P12: library part CONN-5MM-3POS-TERM-BLOCK, "CONN TERM BLOCK 3POS 5mm pitch", Manufacturer 1=Megastar, Manufacturer 2="Weco - Phoenix Contact", Manufacturer Part Number 2="950-DS/03 - 1890976", Code CEGEP=CONWECO0003, Manufacturer Part Number 1=ZX-DG28V-5.0-3P, Mounting Technology=TH, Supplier 1=LCSC, Supplier Part Number 1=ZX-DG28V-5.0-3P
P13: library part CONN-5MM-2POS-TERM-BLOCK, "CONN TERM BLOCK 2POS 5mm pitch", Manufacturer 1=Megastar, Manufacturer 2="Weidmüller - Phoenix Contact", Manufacturer Part Number 2="1760510000 - 1890963", Supplier Part Number 1=C49022995, Code CEGEP=CONWECO0002, Manufacturer Part Number 1=ZX-DG28V-5.0-2P, Mounting Technology=TH, Supplier 1=LCSC
P16 P17: library part CONN-100MIL-SKT-01X20, "CONN SOCKET 20POS 2.54MM", Manufacturer 1=Megastar, Manufacturer Part Number 1=ZX-PM2.54-1-20PY, Supplier Part Number 1=C7499336, Code CEGEP=KCONDIV0053, Localisation=R13-B035, Mounting Technology=TH, Supplier 1=LCSC
R1 R2 R3 R4 R5 R6 R7 R8 R10 R11: library part RES005, "Resistor type 1", Manufacturer 1=Yageo, Manufacturer Part Number 1=RC0402JR-070RL, Max Working Voltage=50V, Supplier Part Number 1=C60485, LibRef=RES005, Mounting Technology=SMT, Supplier 1=LCSC
R9 R12 R13: library part RES010, "Resistor type 1", Manufacturer 1=Panasonic, Manufacturer Part Number 1=ERJ-2RKF5101X, Max Working Voltage=50V, Supplier Part Number 1=C25905, Tolerance=1%, LibRef=RES010, Mounting Technology=SMT, Puissance=1/16W, Supplier 1=LCSC
R14: library part RES007, "Resistor type 1", Manufacturer 1=Panasonic, Manufacturer Part Number 1=ERJ-2RKF4701X, Max Working Voltage=50V, Supplier Part Number 1=C400631, Tolerance=1%, LibRef=RES007, Mounting Technology=SMT, Puissance=1/16W, Supplier 1=LCSC
R15 R19 R21: library part RES003, "Resistor type 1", Manufacturer 1=Vishay, Manufacturer Part Number 1=CR0402F1002T1LF, Max Working Voltage=50V, Supplier Part Number 1=541-10.0KLCT-ND, Tolerance=1%, LibRef=RES003, Mounting Technology=SMT, Puissance=1/16W, Supplier 1=Digikey
R16: library part RES020, "Resistor type 1", Manufacturer 1=Yageo, Manufacturer Part Number 1=RC1206FR-0720RL, Max Working Voltage=200V, Supplier Part Number 1=C114941, Tolerance=1%, CEGEP=RESI00020SMT, LibRef=RES020, Mounting Technology=SMT, Puissance=1/4W, Supplier 1=LCSC
R17 R18: library part RES026, "Resistor type 1", Manufacturer 1=Yageo, Manufacturer Part Number 1=RC0402FR-0749k9L, Max Working Voltage=50V, Supplier Part Number 1=C137969, Tolerance=1%, LibRef=RES026, Mounting Technology=SMT, Puissance=1/16W, Supplier 1=LCSC
R20: library part RES014, "Resistor type 1", Manufacturer 1=Yageo, Manufacturer Part Number 1=RC1206FR-07120RL, Max Working Voltage=200V, Supplier Part Number 1=C114928, Tolerance=1%, CEGEP=RESI0043SMT, LibRef=RES014, Mounting Technology=SMT, Puissance=1/4W, Supplier 1=LCSC, Supplier 2=Digikey, Supplier Part Number 2=P120ECT-ND
U1: library part U_CH340X, "IC USB to Serial Port", Manufacturer 1="WCH(Jiangsu Qin Heng)", Supplier Part Number 1=C3035748, Code CEGEP=KPTSO02, Manufacturer Part Number 1=CH340X, Mounting Technology=SMT, Supplier 1=LCSC
U2: library part U_TPD4E05U06, "TVS DIODE 5.5V 14V 10USON", Manufacturer 1="Texas Instruments", Manufacturer 2=ElecSuper, Manufacturer Part Number 2=TPD4E05U06QDQARQ1-ES, Supplier Part Number 1=C81353, Manufacturer Part Number 1=TPD4E05U06QDQARQ1, Mounting Technology=SMT, Supplier 1=LCSC, Supplier 2=Digikey, Supplier Part Number 2=296-40696-1-ND
U3: library part U_AMS1117-3.3, "LDO Voltage Regulators 1A, 3.3V", Manufacturer 1=UMW, Manufacturer 2="Advanced Monolithic Systems", Supplier Part Number 1=C347222, Manufacturer Part Number 1=AMS1117-3.3, Manufacturer Part Number 2=AMS1117-3.3, Mounting Technology=SMT, Supplier 1=LCSC, Supplier 2=LCSC, Supplier Part Number 2=C6186
U4 U5: library part U_TXB0108PWR, "IC 8-Bit Bidirectional Voltage-Level Translator with Auto-Direction Sensing 20-Pin TSSOP (PW)", Manufacturer 1="Texas Instruments", Supplier Part Number 1=C53406, Manufacturer Part Number 1=TXB0108PWR, Mounting Technology=SMT, Supplier 1=LCSC
U6: library part U_SN65HVD230DR, "IC TRANSCEIVER HALF 1/1 8SOIC", Manufacturer 1=TI, Supplier Part Number 1=C12084, Manufacturer Part Number 1=SN65HVD230DR, Mounting Technology=SMT, Supplier 1=LCSC
VR1: library part RP-POT10K-MULTI-TURN-TOP-TH, "TRIMMER 10K OHM 0.5W PC PIN TOP", Manufacturer 1=JIERR, Manufacturer 2=BOURNS, Supplier Part Number 1=C49190453, Manufacturer Part Number 1=3296W-1-103LF, Manufacturer Part Number 2=3296W-1-103LF, Mounting Technology=TH, Supplier 1=LCSC, Supplier 2=LCSC, Supplier Part Number 2=C34846

## Free pads (board coordinates)
  oval 9.801x7.1 hole 2.85 slot 5.403 at 75.8 deg rot 75.8: pt20(107.75,6.25)

## Via types
v1: diameter 0.7, hole 0.3, Top Layer to Bottom Layer, tented both sides, 534 vias
v2: diameter 1, hole 0.5, Top Layer to Bottom Layer, tented both sides, 92 vias

## Nets (pads, with @x,y where several pads share a name; then routed paths per layer and width w, separated by ;. In a path a pad name is that pad's centre, name@x,y a point inside that pad or via, vN(x,y) a via of type N, cw(c..) or ccw(c..) an arc to the next point about the centre after c; other vN are vias at no path point)
A0-CS1_B_5V: P16.12 P17.16 U5.20 | length 100.1
  Top Layer w0.15: U5.20@100.95,53.925 103.886,53.925 106.061,51.75 130,51.75 v1(147,34.75)
  Bottom Layer w0.15: P17.16@129.101,5.009 130.342,6.25 145.592,6.25 146.94,7.598 146.94,34.69 v1(147,34.75)
A1-CS2_B_5V: P16.13 P17.15 R17.1 R18.2 U5.18 | length 131.5
  Top Layer w0.15: U5.18@100.95,52.625 104.125,52.625 106.25,50.5 128.5,50.5 v1(149.5,29.5) ; P17.15@131.641,5.009 130.399,6.25 128.25,6.25 127.803,6.697 127.803,9.053 131,12.25 146,12.25 149.421,8.829 P16.13@149.421,7.539 149.471,7.488 149.471,6.529 150.75,5.25 150.75,4 151.25,3.5 152.5,3.5 153.25,4.25 153.25,10.75 155.25,12.75 R17.1@155.25,13.55 ; R17.1@155.3,13.6 R17.1@155.25,13.55 ; R18.2@156.75,13.55 R17.1@155.25,13.55
  Bottom Layer w0.15: P16.13@149.421,7.539 149.46,7.578 149.46,29.46 v1(149.5,29.5)
A2-W/R_5V: P16.15 P17.5 U5.17 | length 85.5
  Top Layer w0.15: U5.17@100.95,51.975 103.775,51.975 106.5,49.25 126.75,49.25 151.25,24.75 v1(154.25,24.75) ; P16.15@154.501,7.539 154.506,7.539 157.036,5.009 P17.5@157.041,5.009
  Bottom Layer w0.15: v1(154.25,24.75) 154.25,11.304 154.5,11.054 P16.15@154.501,7.539
A3-DI_5V: P16.16 P17.4 U5.16 | length 86.6
  Top Layer w0.15: U5.16@100.95,51.325 103.425,51.325 106.75,48 125.5,48 151,22.5 v1(157,22.5) ; P16.16@157.041,7.539 157.046,7.539 159.576,5.009 P17.4@159.581,5.009
  Bottom Layer w0.15: v1(157,22.5) 157.02,22.48 157.02,7.559 P16.16@157.041,7.539
CAN_N: J4.1 P12.2 U6.6 | length 26.7
  Top Layer w0.125: P12.2@7.381,55.006 7.381,52.323 7.455,52.25 12.25,52.25 15.354,55.354 15.634,55.634 15.707,55.707 17.203,55.707 17.448,55.952 ; U6.6@15.535,64.752 15.535,63.943 16.09,63.388 16.09,62.535 16.09,62.431 18.25,60.271 18.25,56.754 17.448,55.952 ; J4.1@17.185,57.975 17.185,56.215 17.448,55.952
CAN_P: P12.1 R20.1 U6.7 | length 26.4
  Top Layer w0.125: P12.1@7.381,50.006 7.381,51.927 7.455,52 12.354,52 15.81,55.457 17.307,55.457 17.625,55.775 ; U6.7@16.805,64.752 16.805,63.819 16.34,63.354 16.34,62.535 18.427,60.448 18.5,60.375 18.5,56.65 17.625,55.775 ; R20.1@17.375,53.975 17.95,54.55 17.95,55.45 17.625,55.775
CS0_B-E_5V: P16.17 P17.6 U5.15 | length 90.3
  Top Layer w0.15: U5.15@100.95,50.675 103.075,50.675 107.25,46.5 124.25,46.5 150.5,20.25 v1(159.75,20.25)
  Bottom Layer w0.15: P17.6@154.501,5.009 155.742,6.25 158.292,6.25 159.665,7.623 159.665,20.165 v1(159.75,20.25)
D0_5V: P16.4 P17.7 U4.20 | length 90.7
  Top Layer w0.15: U4.20@100.95,43.925 116.575,43.925 124.75,35.75 v1(126.5,35.75) ; P16.4@126.561,7.539 126.691,7.669 126.691,9.084 130.857,13.25 146.274,13.25 150.691,8.834 150.691,6.279 P17.7@151.961,5.009
  Bottom Layer w0.15: v1(126.5,35.75) 126.53,35.72 126.53,7.569 P16.4@126.561,7.539
D1_5V: P16.5 P17.8 U4.18 | length 85.1
  Top Layer w0.15: U4.18@100.95,42.625 115.125,42.625 124.25,33.5 v1(129.25,33.5) ; P16.5@129.101,7.539 129.191,7.629 129.191,9.084 131.691,11.584 145.354,11.584 148.191,8.747 148.191,6.239 P17.8@149.421,5.009
  Bottom Layer w0.15: P16.5@129.101,7.539 129.175,7.613 129.175,33.425 v1(129.25,33.5)
D2_5V: P16.6 P17.9 U4.17 | length 80
  Top Layer w0.15: U4.17@100.95,41.975 113.025,41.975 123.5,31.5 v1(131.75,31.5) ; P16.6@131.641,7.539 131.691,7.589 131.691,8.334 134.154,10.797 143.613,10.797 145.691,8.719 145.691,6.199 P17.9@146.881,5.009
  Bottom Layer w0.15: P16.6@131.641,7.539 131.695,7.593 131.695,31.445 v1(131.75,31.5)
D3_5V: P16.7 P17.10 U4.16 | length 76.1
  Top Layer w0.15: U4.16@100.95,41.325 110.92,41.325 122.995,29.25 v1(134.25,29.25) ; P16.7@134.181,7.539 134.181,8.874 135.371,10.064 142.576,10.064 143.269,9.371 143.269,6.08 P17.10@144.341,5.009
  Bottom Layer w0.15: P16.7@134.181,7.539 134.215,7.573 134.215,29.215 v1(134.25,29.25)
D4_5V: P16.8 P17.11 U4.15 | length 72.1
  Top Layer w0.15: U4.15@100.95,40.675 109.07,40.675 122.745,27 v1(136.75,27) ; P16.8@136.721,7.539 138.412,9.23 142.218,9.23 142.868,8.58 142.868,6.077 P17.11@141.801,5.009
  Bottom Layer w0.15: P16.8@136.721,7.539 136.735,7.553 136.735,26.985 v1(136.75,27)
D5_5V: P16.9 P17.12 U4.14 | length 64.4
  Top Layer w0.15: U4.14@100.95,40.025 106.975,40.025 122.25,24.75 v1(139.25,24.75) ; P17.12@139.261,5.009 P16.9@139.261,7.539
  Bottom Layer w0.15: v1(139.25,24.75) 139.255,24.745 139.255,7.544 P16.9@139.261,7.539
D6_5V: P16.10 P17.13 U4.13 | length 71.4
  Top Layer w0.15: U4.13@100.95,39.375 104.375,39.375 121.25,22.5 v1(141.75,22.5) ; P17.13@136.721,5.009 138.217,3.512 139.869,3.512 140.441,4.084 140.441,6.179 P16.10@141.801,7.539
  Bottom Layer w0.15: v1(141.75,22.5) 141.775,22.475 141.775,7.564 P16.10@141.801,7.539
D7_5V: P16.11 P17.14 U4.12 | length 80.3
  Top Layer w0.15: U4.12@100.95,38.725 102.275,38.725 120.75,20.25 v1(144.25,20.25) ; P17.14@134.181,5.009 136.195,2.994 144.297,2.994 145.628,4.326 145.628,5.646 145.191,6.084 145.191,6.689 P16.11@144.341,7.539
  Bottom Layer w0.15: v1(144.25,20.25) 144.295,20.205 144.295,7.584 P16.11@144.341,7.539
GND: C1.1 C2.1 C3.1 C4.1 C5.1 C6.1 C7.1 C8.1 C9.1 C10.1 C11.1 C12.1 C13.1 C14.1 C15.1 C16A.1 C16B.1 C17A.1 C17B.1 C18.1 C19.1 C20.1 C21.1 C22.1 C23.1 C24.1 C25.1 C26.1 C27.1 GND1.1 GND2.1 GND3.1 GND4.1 J1.2 MH1.1 MH2.1 MH3.1 MH4.1 MH5.1 MH6.1 MH7.1 MH8.1 MH9.1 MH10.1 MH11.1 MIKROBUSA.8 MIKROBUSA.9 MIKROBUSB.8 MIKROBUSB.9 P1.3 P2.1 P2.2 P3.1 P3.2 P4.1 P4.2 P4.5 P4.23 P4.49 P4.50 P5.1 P5.2 P5.49 P5.50 P6.1 P6.2 P6.3 P6.4 P6.A1 P6.A12 P6.B1 P6.B12 P7.5 P8.5 P9.5 P10.5 P11.5 P12.3 P13.1 P16.2 P16.20 P17.1 P17.20 pad.pt20 R12.1 R13.1 R18.1 R19.1 R21.1 U1.3 U2.3 U2.8 U3.1 U4.11 U5.7 U5.8 U5.9 U5.11 U5.12 U5.13 U5.14 U6.2 VR1.3 | length 174.1
  Top Layer w0.15: v1(17.5,11) 17.453,11.047 17.453,12.1 U2.3@17.405,12.148 U2.8@17.405,12.983 17.405,15.112 17.493,15.2 R12.1@18,15.2 18.162,15.362 18.162,15.662 v1(18.75,16.25) 19.25,15.75 19.25,15.45 R13.1@19.5,15.2 ; 93.775,48.725 93.837,48.725 ; 93.775,48.739 93.775,47.363 94,47.138 v1(94,47) ; U5.9@95.05,48.725 93.837,48.725 ; U5.8@95.05,49.375 94.962,49.463 93.837,49.463 ; U5.7@95.05,50.025 94.173,50.025 93.837,49.689 93.837,49.463 ; U5.11@100.95,48.075 101.025,48 102.25,48 102.5,48.25 102.5,48.75 ; U5.12@100.95,48.725 102.475,48.725 102.5,48.75 ; U5.13@100.95,49.375 102.5,49.375 ; U5.14@100.95,50.025 102.225,50.025 102.5,49.75 102.5,49.375 ; 93.837,48.725 93.837,49.463 ; 102.5,48.75 102.5,49.375
  Top Layer w0.2: R21.1@66.49,31.29 66.53,31.25 v1(67.5,31.25)
  Top Layer w0.3: v2(11,65.5) C25.1@11,67.55 ; P6.1@12.675,8.545 12.675,8.573 12.952,8.85 14.025,8.85 ; P6.B12@14.025,8.175 14.025,8.85 ; P6.A1@14.025,9.525 14.025,8.85 ; v2(16.5,73.5) 16.5,72.47 C26.1@16.34,72.31 16.805,71.845 U6.2@16.805,69.58 ; v2(17.199,37.402) 18.548,37.402 C14.1@19,36.95 19.5,37.45 20.95,37.45 v2(21,37.5) C15.1@21,35.95 ; C12.1@18.95,26.5 v2(21,26.5) ; P6.B1@19.975,8.175 19.975,8.85 ; P6.A12@19.975,9.525 19.975,8.85 ; R19.1@20,65.95 v2(20,67.5) ; C13.1@20.2,28.75 20.816,29.366 21.366,29.366 v2(21.5,29.5) ; P6.2@21.325,8.545 21.325,8.573 21.048,8.85 19.975,8.85 ; C1.1@24.25,9.05 24.35,9.05 25.7,7.7 v2(25.7,7.523) ; v1(25.25,15.25) 25.75,15.75 U1.3@26.95,15.75 28,15.75 v1(28.75,16.5) ; v1(29.5,18.25) C2.1@30.55,18.25 ; C3.1@33,14 33.75,13.25 v1(33.75,13.2) ; v2(94,85.25) 94,86.95 C24.1@94.05,87 94,87.05 v2(94,88.75) ; C21.1@102.2,55.75 102.349,55.601 102.649,55.601 v2(103.25,55) ; C22.1@102.45,45.25 102.45,45.95 v2(103,46.5) ; R18.1@156.75,14.45 157.95,14.45 v1(158,14.5)
  Top Layer w0.4: v2(23,28) C4.1@25,28 v2(25,29.5) ; v2(23.5,21) 23.615,21.115 23.815,21.115 C9.1@24.75,22.05 ; C8.1@26.75,21.55 26.85,21.55 27.3,21.1 27.3,20.356 v2@28,19.656 ; C5.1@27.5,28 v2(27.5,29.5) ; v2(28,19.5) v2@28,19.656 ; v2(31,20.5) 30.266,21.234 29.566,21.234 C7.1@29.25,21.55 29.15,21.55 28.7,21.1 28.7,20.356 v2@28,19.656 ; v1(94,47) 94,46.919 94.277,46.642 C20.1@94.277,45.79 ; C19.1@97.45,36.5 97.5,36.55 v1(97.5,37.5) ; U4.11@100.95,38.075 100.975,38.075 101,38.05 v1(101,37) ; U5.11@100.95,48.075 100.95,47.05 v1(101,47)
  Top Layer w0.5: v2(7,95.5) 7.135,95.5 7.535,95.1 8.525,95.1 8.967,94.658 v2(10.567,94.658) ; C23.1@9,94.7 v2(9,96.3) ; C27.1@54.25,102.05 55.45,102.05 v2(56.25,101.25) ; v2(115.5,11.75) 116.25,12.5 116.65,12.5 117.05,12.9 C18.1@117.05,13 117,13.05 v2(117,14.75) ; v2(149,80) 147.05,80 C17B.1@147,80.05 C17B.1@146.94,80.11 ; 118.75,78.32 v2(118.75,80) ; 118.75,78.32 116.315,78.32 116.135,78.5 v2(116,78.5) C16B.1@116,80.05 116.025,80.025 118.725,80.025 v2(118.75,80) ; 118.75,78.32 v2(120.57,78.32) MIKROBUSB.8@120.57,80.11 120.515,80.055 118.805,80.055 v2(118.75,80) ; v2(145.5,77.75) v2(143.5,77.75) 143.465,77.785 143.465,80.075 MIKROBUSB.9@143.43,80.11 145.5,80.11 ; v2(145.5,77.75) 145.5,80.11 ; v2(145.5,77.75) 145.596,77.846 146.346,77.846 146.94,78.44 C17B.1@146.94,80.11 ; 145.5,80.11 C17B.1@146.94,80.11 ; 158.25,78 158.315,78.065 v2(158.315,80.11) ; 158.25,78 156.635,78 156.135,78.5 v2(156,78.5) C16A.1@156,80.05 156.06,80.11 v2(158.315,80.11) ; 158.25,78 v2(160.5,78) 160.535,78.035 160.535,80.075 MIKROBUSA.8@160.57,80.11 v2(158.315,80.11) ; 185.25,78 185.376,78.126 v2(185.376,80.115) ; 185.25,78 v2(183.5,78) 183.465,78.035 183.465,80.075 MIKROBUSA.9@183.43,80.11 183.432,80.112 185.374,80.112 v2(185.376,80.115) ; 185.25,78 187,78 ; v2(185.376,80.115) 185.408,80.082 186.968,80.082 C17A.1@187,80.05 ; 187,78 C17A.1@187,80.05 ; 187,78 188.457,78 189,78.543 v2(189,80) 187.05,80 C17A.1@187,80.05
  Top Layer w0.6: v2(43,28.5) C10.1@43,30.05 v2(45.05,30.05) 45.5,30.5 C11.1@45.5,31.55
  Top Layer w0.8: C4.1@25,28 C5.1@27.5,28 31.569,28 32.279,27.29 U3.1@32.605,27.29
  Bottom Layer w0.3: P6.B12@14.025,8.175 P6.A1@14.025,9.525 ; P6.B1@19.975,8.175 19.975,8.85 ; P6.A12@19.975,9.525 19.975,8.85 ; P6.2@21.325,8.545 21.325,8.573 21.048,8.85 19.975,8.85
  other v1: 12.5,2.5 17.5,2.5 32.5,2.5 37.5,2.5 42.5,2.5 47.5,2.5 52.5,2.5 57.5,2.5 62.5,2.5 67.5,2.5 72.5,2.5 77.5,2.5 82.5,2.5 87.5,2.5 92.5,2.5 97.5,2.5 102.5,2.5 112.5,2.5 117.5,2.5 165,2.5 170,2.5 175,2.5 180,2.5 185,2.5 190,2.5 172.5,5 37.5,7.5 42.5,7.5 47.5,7.5 52.5,7.5 57.5,7.5 62.5,7.5 67.5,7.5 72.5,7.5 77.5,7.5 87.5,7.5 92.5,7.5 167.5,10 172.5,10 182.5,10 187.5,10 192.5,10 197.5,10 2.5,12.5 37.5,12.5 42.5,12.5 47.5,12.5 52.5,12.5 57.5,12.5 62.5,12.5 67.5,12.5 72.5,12.5 77.5,12.5 82.5,12.5 92.5,12.5 110,15 172.5,15 177.5,15 182.5,15 187.5,15 192.5,15 197.5,15 2.5,17.5 42.5,17.5 47.5,17.5 52.5,17.5 57.5,17.5 62.5,17.5 67.5,17.5 72.5,17.5 77.5,17.5 82.5,17.5 92.5,17.5 125,17.5 152.5,17.5 162.5,17.5 165,17.5 25,18.5 35,20 107.5,20 112.5,20 117.5,20 172.5,20 177.5,20 182.5,20 187.5,20 192.5,20 197.5,20 2.5,22.5 47.5,22.5 52.5,22.5 57.5,22.5 62.5,22.5 67.5,22.5 72.5,22.5 77.5,22.5 82.5,22.5 92.5,22.5 145,22.5 160,22.5 165,22.5 107.5,25 112.5,25 157.5,25 172.5,25 177.5,25 182.5,25 187.5,25 192.5,25 197.5,25 2.5,27.5 52.5,27.5 72.5,27.5 77.5,27.5 82.5,27.5 92.5,27.5 140,27.5 152.5,27.5 160,27.5 165,27.5 32.5,30 107.5,30 172.5,30 177.5,30 182.5,30 187.5,30 192.5,30 197.5,30 2.5,32.5 25,32.5 30,32.5 35,32.5 135,32.5 150,32.5 155,32.5 160,32.5 165,32.5 37.5,35 42.5,35 47.5,35 52.5,35 57.5,35 72.5,35 77.5,35 90,35 172.5,35 177.5,35 182.5,35 187.5,35 192.5,35 197.5,35 2.5,37.5 125,37.5 130,37.5 155,37.5 160,37.5 165,37.5 2.5,40 37.5,40 42.5,40 47.5,40 52.5,40 57.5,40 62.5,40 67.5,40 72.5,40 77.5,40 92.5,40 145,40 172.5,40 177.5,40 182.5,40 187.5,40 192.5,40 197.5,40 22.5,42.5 90,42.5 120,42.5 125,42.5 150,42.5 155,42.5 160,42.5 165,42.5 2.5,45 55,45 60,45 140,45 172.5,45 177.5,45 182.5,45 187.5,45 192.5,45 197.5,45 20,47.5 57.5,47.5 145,47.5 150,47.5 155,47.5 160,47.5 165,47.5 135,50 172.5,50 177.5,50 182.5,50 187.5,50 192.5,50 197.5,50 12.5,51 16.5,52 2.5,52.5 25,52.5 140,52.5 145,52.5 150,52.5 155,52.5 160,52.5 165,52.5 35,55 40,55 45,55 50,55 112.5,55 122.5,55 127.5,55 132.5,55 172.5,55 182.5,55 187.5,55 192.5,55 197.5,55 88.49,56.428 2.5,57.5 12.5,57.5 25,57.5 65,57.5 72.5,57.5 115,57.5 122.5,57.5 125,57.5 130,57.5 135,57.5 140,57.5 145,57.5 150,57.5 155,57.5 160,57.5 165,57.5 170,57.5 35,60 45,60 55,60 115,60 182.5,60 187.5,60 192.5,60 197.5,60 38.727,62.271 2.5,62.5 12.5,62.5 20,62.5 35,65 42.5,65 47.5,65 52.5,65 57.5,65 67.5,65 182.5,65 187.5,65 192.5,65 197.5,65 2.5,67.5 55,67.5 130,67.5 135,67.5 140,67.5 145,67.5 150,67.5 155,67.5 160,67.5 165,67.5 170,67.5 7.5,70 37.5,70 45,70 170,70 175,70 187.5,70 113.25,70.25 101.25,70.5 2.5,72.5 35,72.5 42.5,72.5 187.5,72.5 10,75 105.25,75 108.75,75 116.25,75 130,75 135,75 140,75 147.5,75 152.5,75 157.5,75 162.5,75 165,75 175,75 180,75 190,75 192.5,75 2.5,77.5 35,77.5 40,77.5 52.5,77.5 57.5,77.5 132.5,77.5 162.5,77.5 167.5,77.5 177.5,77.5 180,77.5 197.5,77.5 40,80 55,80 60,80 65,80 95,80 152.5,80 162.5,80 167.5,80 192.5,80 2.5,82.5 35,82.5 37.5,82.5 137.5,82.5 162.5,82.5 197.5,82.5 127.5,85 155,85 162.5,85 167.5,85 172.5,85 190,85 192.5,85 2.5,87.5 17.5,87.5 22.5,87.5 42.5,87.5 47.5,87.5 52.5,87.5 57.5,87.5 62.5,87.5 67.5,87.5 130,87.5 152.5,87.5 162.5,87.5 197.5,87.5 115,90 117.5,90 162.5,90 167.5,90 172.5,90 190,90 192.5,90 2.5,92.5 20,92.5 40,92.5 45,92.5 50,92.5 55,92.5 60,92.5 65,92.5 197.5,92.5 127.5,95 162.5,95 167.5,95 172.5,95 177.5,95 190,95 192.5,95 69.421,97.024 2.5,97.5 12.5,97.5 17.5,97.5 22.5,97.5 37.5,97.5 42.5,97.5 47.5,97.5 52.5,97.5 57.5,97.5 62.5,97.5 127.5,97.5 130,97.5 180,97.5 197.5,97.5 60,100 107.5,100 71.409,100.296 15,102.5 20,102.5 25,102.5 35,102.5 40,102.5 45,102.5 50,102.5 80,102.5 85,102.5 90,102.5 110,102.5 155,102.5 160,102.5 165,102.5 170,102.5 175,102.5 180,102.5 185,102.5 12.5,107.5 17.5,107.5 22.5,107.5 27.5,107.5 32.5,107.5 37.5,107.5 42.5,107.5 47.5,107.5 52.5,107.5 57.5,107.5 62.5,107.5 67.5,107.5 72.5,107.5 77.5,107.5 82.5,107.5 87.5,107.5 92.5,107.5 107.5,107.5 112.5,107.5 117.5,107.5 122.5,107.5 127.5,107.5 132.5,107.5 137.5,107.5 142.5,107.5 147.5,107.5 152.5,107.5 157.5,107.5 162.5,107.5 167.5,107.5 172.5,107.5 177.5,107.5 182.5,107.5 187.5,107.5
  other v2: 31,28
LCD-RESET: P16.14 P17.17 R15.1 | length 36.3
  Top Layer w0.15: P16.14@151.961,7.539 151.961,11.961 R15.1@152,12
  Bottom Layer w0.15: P17.17@126.561,5.009 128.319,3.25 152.5,3.25 153.25,4 153.25,6.249 P16.14@151.961,7.539
LED-A: P16.19 P17.19 R16.2 | length 52.5
  Top Layer w0.5: P16.19@164.661,7.539 164.75,7.628 R16.2@164.75,11.05
  Bottom Layer w0.5: P17.19@121.481,5.009 121.481,3.269 122.5,2.25 161.822,2.25 163.384,3.812 163.384,6.262 P16.19@164.661,7.539
MB1-RX: MIKROBUSA.14 R3.1 | length 31.7
  Top Layer w0.15: R3.1@152.9,92.5 153.75,92.5 155.338,94.088 176.912,94.088 178.19,92.81 MIKROBUSA.14@183.43,92.81
MB1-TX: MIKROBUSA.13 R4.1 | length 32.7
  Top Layer w0.15: R4.1@153,91 154.25,91 154.796,91.546 156.641,93.391 158.235,93.391 160.079,91.546 182.154,91.546 MIKROBUSA.13@183.43,90.27
MB2-RX: MIKROBUSB.14 R1.1 | length 6.4
  Top Layer w0.15: v1(148.5,93) 149,92.5 R1.1@149.55,92.5
  Bottom Layer w0.15: MIKROBUSB.14@143.43,92.81 148.161,92.81 148.351,93 v1(148.5,93)
MB2-TX: MIKROBUSB.13 R2.1 | length 6.4
  Top Layer w0.15: v1(148.5,90.5) 149,91 R2.1@149.55,91
  Bottom Layer w0.15: MIKROBUSB.13@143.43,90.27 143.555,90.395 148.395,90.395 v1(148.5,90.5)
NC/V0: P16.3 P17.3 VR1.2 | length 80.9
  Top Layer w0.3: VR1.2@98.75,12.21 102.46,12.21 106.75,16.5 119,16.5 124.021,11.479 P16.3@124.021,7.539 122.734,6.252 122.734,3.04 124.274,1.5 160.857,1.5 162.121,2.764 P17.3@162.121,5.009
NC/VEE: P16.18 P17.18 VR1.1 | length 82.5
  Top Layer w0.3: VR1.1@98.74,14.75 99.99,13.5 101.75,13.5 106,17.75 120,17.75 125.25,12.5 125.25,6.238 P17.18@124.021,5.009 124.021,3.754 125.411,2.364 159.471,2.364 160.851,3.744 160.851,6.269 P16.18@162.121,7.539
NetC2_2: C2.2 U1.10 | length 1.9
  Top Layer w0.2: U1.10@31.05,16.75 31.45,16.75 C2.2@31.45,18.25
NetC4_2: C4.2 C5.2 C6.2 D3.2 U3.2 U3.4 | length 20.1
  Top Layer w0.8: C4.2@25,26.1 C5.2@27.5,26.1 30.818,26.1 ; 39.5,28 39.5,29.43 39.87,29.8 39.87,29.9 39.9,29.93 D3.2@40,29.93
  Top Layer w1.2: 30.818,26.1 31.889,25.029 32.576,25.029 U3.2@32.605,25
  Top Layer w2: U3.2@32.605,25 U3.4@39.395,25 39.5,25.105 39.5,28
NetC7_2: C7.2 C8.2 C9.2 D2.1 D4.1 U3.3 | length 21.2
  Top Layer w0.6: C9.2@24.75,22.95 25.25,23.45
  Top Layer w0.8: D4.1@20.07,23.5 21.45,23.5 22.475,22.475 ; D2.1@21.5,16.07 21.5,21.5 22.475,22.475 ; U3.3@32.605,22.71 32.238,22.71 31.498,23.45 C7.2@29.25,23.45 C8.2@26.75,23.45 25.25,23.45 23.45,23.45 22.475,22.475
NetCC1_1: CC1.1 P6.A5 R12.2 U2.4 U2.7 | length 20.6
  Top Layer w0.15: R12.2@18,14.3 17.905,14.205 U2.7@17.905,12.983 17.905,11.718 18.623,11 v1(18.75,11)
  Bottom Layer w0.15: P6.A5@15.725,9.525 15.725,9.999 16.066,10.34 18.09,10.34 v1(18.75,11) 19.516,10.234 22.016,10.234 24,8.25 24,5.25 CC1.1@26.5,2.75
NetCC2_1: CC2.1 P6.B5 R13.2 U2.5 U2.6 | length 27.9
  Top Layer w0.15: U2.5@18.405,12.148 U2.5@18.405,12.225 ; v1(19.5,13) 18.75,12.25 18.43,12.25 U2.5@18.405,12.225 ; R13.2@19.5,14.3 18.43,13.23 18.43,13.008 U2.6@18.405,12.983 U2.5@18.405,12.225
  Bottom Layer w0.15: P6.B5@18.275,8.175 18.275,7.525 17.75,7 ; v1(19.5,13) 16.408,13 13.401,9.992 13.401,7.599 14,7 17.75,7 ; CC2.1@23.75,2.75 21.25,2.75 17.75,6.25 17.75,7
NetJ4_2: J4.2 R20.2 | length 4.2
  Top Layer w0.125: J4.2@19.725,57.975 19.725,54.525 R20.2@20.275,53.975
NetP1_4: P1.4 R9.2 | length 5
  Top Layer w0.15: P1.4@60.88,27.94 60.88,31.33 R9.2@62.05,32.5
NetP4_6: P4.6
NetP4_8: P4.8
NetP4_9: P4.9
NetP4_12: P4.12
NetP4_16: P4.16
NetP4_24: P4.24
NetP4_34: P4.34
NetP5_7: P5.7
NetP5_8: P5.8
NetP5_9: P5.9
NetP5_10: P5.10
NetP5_11: P5.11
NetP5_12: P5.12
NetP5_16: P5.16
NetP5_18: P5.18
NetP5_21: P5.21
NetP5_25: P5.25
NetP5_28: P5.28
NetP5_29: P5.29
NetP5_30: P5.30
NetP5_31: P5.31
NetP5_32: P5.32
NetP5_35: P5.35
NetP5_37: P5.37
NetP5_39: P5.39
NetP5_41: P5.41
NetP5_42: P5.42
NetP5_44: P5.44
NetP5_48: P5.48
NetR14_1: R14.1 U1.5 | length 4.3
  Top Layer w0.15: U1.5@26.95,14.75 28.502,14.75 30.003,13.25 30.05,13.25 R14.1@30.3,13 R14.1@30.3,12.74
NetR14_2: R14.2 U1.6 | length 1.8
  Top Layer w0.15: U1.6@31.05,14.75 31.05,13.15 R14.2@31.2,13
NetR19_2: R19.2 U6.8 | length 2.1
  Top Layer w0.15: U6.8@18.075,64.752 18.075,64.832 18.293,65.05 R19.2@20,65.05
PA1/TIM-2/5: MIKROBUSB.16 P4.11 | length 92.3
  Top Layer w0.15: P4.11@82.55,48.26 82.81,48 84.115,48 84.958,48.843 84.958,58.958 90.604,64.604 113.104,64.604 134.5,86 134.5,94 138.39,97.89 MIKROBUSB.16@143.43,97.89
PA2/USART2-TX: P1.5 P4.14 R5.2 R7.2 | length 63
  Top Layer w0.15: P1.5@58.34,27.94 58.34,31.464 61.726,34.849 65.323,34.849 65.62,35.147 R7.2@65.62,35.865 R5.2@67.26,35.865 67.26,35.24 67.5,35 70,35 73,32 83.75,32 86.75,35 86.75,52 v1(87.25,52.5)
  Bottom Layer w0.15: P4.14@80.01,50.8 80.322,51.112 81.095,51.112 81.983,52 86.75,52 v1(87.25,52.5)
PA3/USART2-RX: P4.13 R6.2 R8.2 R9.1 R21.2 | length 51.7
  Top Layer w0.15: R9.1@62.95,32.5 64.974,32.5 65.62,33.146 R8.2@65.62,33.96 R6.2@67.26,33.96 67.26,32.74 ; R21.2@66.49,32.19 67.04,32.74 67.26,32.74 ; v1(87.75,50.75) 87.75,34.5 84.25,31 69,31 67.26,32.74
  Bottom Layer w0.15: P4.13@82.55,50.8 82.575,50.775 87.725,50.775 v1(87.75,50.75)
PA5/SPI1-CLK: P4.15 P8.4 | length 113.6
  Bottom Layer w0.15: P8.4@12.62,84.77 10.25,82.4 10.25,79.5 11.301,78.449 17.207,78.449 21.218,74.437 21.218,49.236 28.496,41.959 47.709,41.959 57.825,52.075 81.285,52.075 P4.15@82.55,53.34
PA6/SPI1-MISO: P4.18 P8.3 | length 100.1
  Bottom Layer w0.15: P8.3@12.62,82.23 17.02,82.23 23.021,76.229 23.021,51.6 27.598,47.023 49.773,47.023 58.63,55.88 P4.18@80.01,55.88
PA7/SPI1-MOSI: P4.17 P8.2 | length 104.1
  Bottom Layer w0.15: P8.2@12.62,79.69 17.724,79.69 22.086,75.329 22.086,49.922 27.544,44.464 48.714,44.464 58.884,54.634 81.304,54.634 P4.17@82.55,55.88
PA8/I2C3-SCL: MIKROBUSA.12 P5.43 P11.3 | length 174.6
  Top Layer w0.15: v1(64,72.5) 64.078,72.422 98.167,72.422 106.77,81.025 P11.3@106.77,82.61
  Bottom Layer w0.15: P5.43@31.75,88.9 34.068,88.9 50.468,72.5 v1(64,72.5) ; P11.3@106.77,82.61 106.77,82.516 117.286,72 165.5,72 181.23,87.73 MIKROBUSA.12@183.43,87.73
PA15/D3: P5.40 P7.4 | length 25.7
  Top Layer w0.15: P7.4@5,84.77 6.299,86.069 22.654,86.069 24.903,83.82 P5.40@29.21,83.82
PB0/D1: P4.22 P9.4 | length 54.7
  Top Layer w0.15: v1(93.75,81) 93.75,81.02 P9.4@104.23,91.5
  Bottom Layer w0.15: P4.22@80.01,60.96 78.04,60.96 73,66 73,72.558 75.388,74.945 86.445,74.945 92.425,80.925 93.675,80.925 v1(93.75,81)
PB1/TIM-3/8: MIKROBUSA.16 P4.21 | length 135.4
  Bottom Layer w0.15: P4.21@82.55,60.96 84.01,59.5 103.3,59.5 106.3,62.5 171.624,62.5 187,77.876 187,96.5 185.61,97.89 MIKROBUSA.16@183.43,97.89
PB5/D0: P5.26 P7.1 | length 36.6
  Top Layer w0.15: P7.1@5,77.15 6.35,78.5 21.25,78.5 v1(23.25,80.5)
  Bottom Layer w0.15: v1(23.25,80.5) 27,76.75 27,68.25 P5.26@29.21,66.04
PB6/I2C1-SCL: MIKROBUSB.12 P5.23 | length 157.9
  Top Layer w0.15: P5.23@31.75,63.5 37.044,63.5 39,65.456 39,74 49.5,84.5 72.5,84.5 74.5,86.5 74.5,96.5 78.102,100.102 92.898,100.102 95.532,97.468 114.468,97.468 118.5,101.5 145,101.5 146.75,99.75 146.75,91.05 MIKROBUSB.12@143.43,87.73
PB7/D1: P5.24 P7.2 | length 37.6
  Top Layer w0.15: P7.2@5,79.69 6.31,81 v1(21.25,81)
  Bottom Layer w0.15: v1(21.25,81) 21.282,81 26,76.282 26,66.71 P5.24@29.21,63.5
PB8/CS0: P5.19 U5.6 | length 73.8
  Top Layer w0.15: v1(48,60.5) 50.5,60.5 v1(61,50) ; v1(92.75,48.5) 93.227,48.977 93.227,49.727 94.175,50.675 U5.6@95.05,50.675
  Bottom Layer w0.15: P5.19@31.75,58.42 45.92,58.42 v1(48,60.5) ; v1(61,50) 66.5,44.5 88.75,44.5 v1(92.75,48.5)
PB9/I2C1-SDA: MIKROBUSB.11 P5.20 | length 153.6
  Top Layer w0.15: P5.20@29.21,58.42 27,56.21 27,53 27.897,52.103 42.647,52.103 52.893,41.857 83.509,41.857 85.883,44.231 85.883,58.341 91.499,63.957 115.207,63.957 136.44,85.19 MIKROBUSB.11@143.43,85.19